# Altium PCB PCB1.PcbDoc (part 2 of 2)
Units mm, origin at the board's own origin, x right, y up, seen from the top; angles counter-clockwise.
Board outline 68.58 x 53.34 mm, 4 copper layers (Top Layer 1, GND Layer, GND Layer 2, Bottom Layer 2), stack 0.602 mm thick; 89 components, 77 nets, 453 pads, 4 vias.
Unrouted connection lines stored in the file: 288.
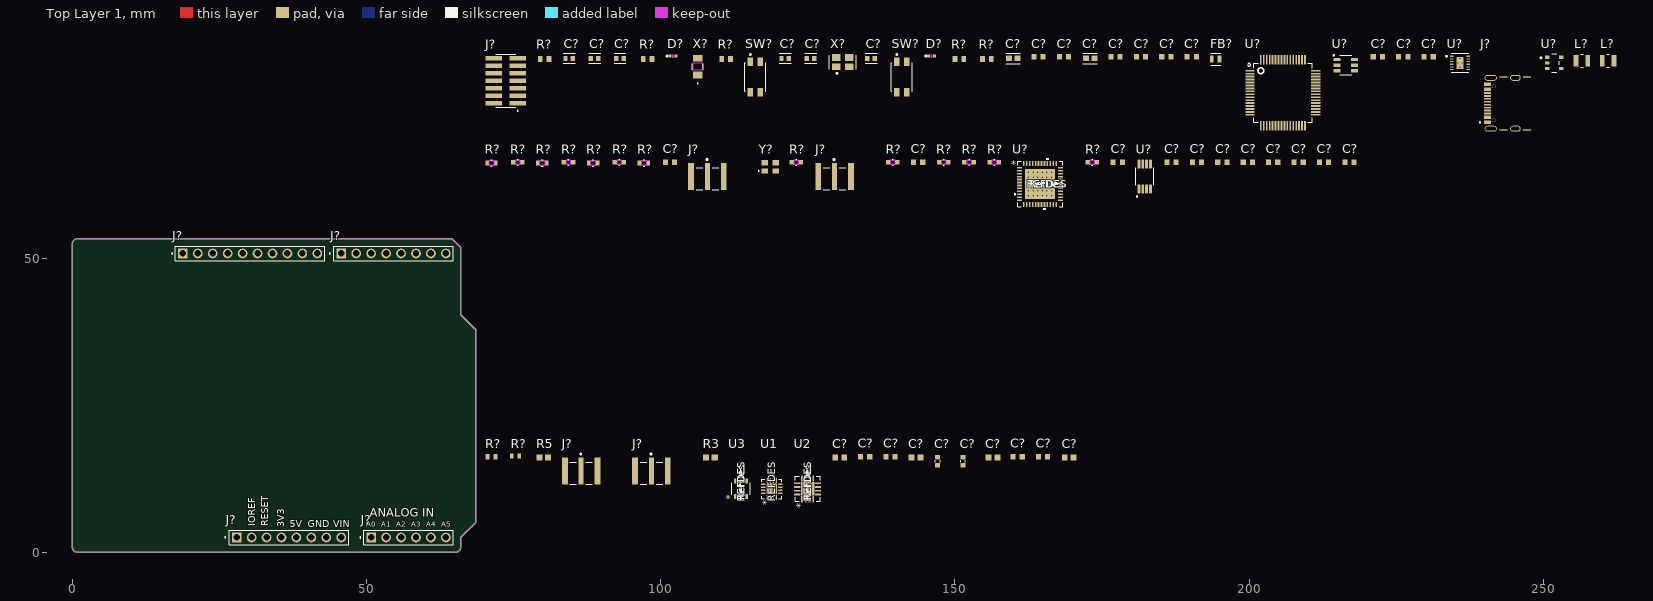
[diagram p0: Top Layer 1 view]

## Part data (continued)
R?: "RES 100K OHM 1% 1/10W 0603", Case/Package=0603, Manufacturer=Yageo, Max Operating Temperature=155°C, Min Operating Temperature=-55°C, Package Height=0.45mm, Package Length=1.6mm, Package Shape=Rectangular, Package Width=0.8mm, Power=100mW, Rated Temperature=70°C, Resistor Type="FIXED RESISTOR", Supplier Part Number=3697448, Temperature Coefficient (ppm/Cel)=100, Tolerance=1%, Working Voltage=75V, Additional Feature="LASER TRIMMABLE", Category="Chip SMD Resistors", ComponentLink1Description=https://datasheet.ciiva.com:443/pdfs/VipMasterIC/IC/YAGO/YAGO-S-A0008145938/YAGO-S-A0008145938-1.pdf?src-supplier=IHS+Markit, ComponentLink1URL=https://datasheet.ciiva.com:443/pdfs/VipMasterIC/IC/YAGO/YAGO-S-A0008145938/YAGO-S-A0008145938-1.pdf?src-supplier=IHS+Markit, ComponentLink2Description=https://datasheet.ciiva.com/11808/0900766b80f96399-11808107.pdf?src-supplier=Rs, ComponentLink2URL=https://datasheet.ciiva.com/11808/0900766b80f96399-11808107.pdf?src-supplier=Rs, ComponentLink3Description=https://datasheet.ciiva.com/22747/443971-22747516.pdf?src-supplier=Element14, ComponentLink3URL=https://datasheet.ciiva.com/22747/443971-22747516.pdf?src-supplier=Element14, ComponentLink4Description=https://datasheet.ciiva.com/46440/1868787-46440889.pdf?src-supplier=Element14, ComponentLink4URL=https://datasheet.ciiva.com/46440/1868787-46440889.pdf?src-supplier=Element14, ComponentLink5Description=https://datasheet.ciiva.com/7746/1738695-7746234.pdf?src-supplier=Element14, ComponentLink5URL=https://datasheet.ciiva.com/7746/1738695-7746234.pdf?src-supplier=Element14, ComponentLink6Description=https://datasheet.ciiva.com/7746/1738695-7746235.pdf?src-supplier=Element14, ComponentLink6URL=https://datasheet.ciiva.com/7746/1738695-7746235.pdf?src-supplier=Element14, ComponentLink7Description=https://datasheet.ciiva.com/7983/443971-7983593.pdf?src-supplier=Element14, ComponentLink7URL=https://datasheet.ciiva.com/7983/443971-7983593.pdf?src-supplier=Element14, Construction=Chip, JESD-609 Code=e3, Manufacturer Part Number=RC0603FR-07100KL, Mounting Technology="Surface Mount", Packaging="Tape and Reel", Pins=2, Pricing="5000=0.0011, 20000=0.0011, 75000=0.001, 150000=0.001, 375000=0.001 (USD)", Reach SVHC Compliant=Yes, RoHS=Yes, RoHS Compliant=Yes, Stock=23540000, Supplier="Future Electronics", Technology="METAL GLAZE/THICK FILM", Terminal Finish=Nickel, Termination=Wraparound
R? R?: "10 kOhms ±1% 0.1W, 1/10W Chip Resistor 0603 (1608 Metric) Moisture Resistant Thick Film", Case/Package=0603, Manufacturer=Yageo, Max Operating Temperature=155°C, Min Operating Temperature=-55°C, Package Height=0.45mm, Package Length=1.6mm, Package Shape=Rectangular, Package Width=0.8mm, Power=100mW, Rated Temperature=70°C, Resistor Type="FIXED RESISTOR", Supplier Part Number=4023214, Temperature Coefficient (ppm/Cel)=100, Tolerance=1%, Working Voltage=75V, Additional Feature="LASER TRIMMABLE", Category="Chip SMD Resistors", ComponentLink1Description=https://datasheet.ciiva.com:443/pdfs/VipMasterIC/IC/YAGO/YAGO-S-A0008145938/YAGO-S-A0008145938-1.pdf?src-supplier=IHS+Markit, ComponentLink1URL=https://datasheet.ciiva.com:443/pdfs/VipMasterIC/IC/YAGO/YAGO-S-A0008145938/YAGO-S-A0008145938-1.pdf?src-supplier=IHS+Markit, ComponentLink2Description=https://datasheet.ciiva.com/22747/443971-22747519.pdf?src-supplier=Element14, ComponentLink2URL=https://datasheet.ciiva.com/22747/443971-22747519.pdf?src-supplier=Element14, ComponentLink3Description=https://datasheet.ciiva.com/46440/1868787-46440891.pdf?src-supplier=Element14, ComponentLink3URL=https://datasheet.ciiva.com/46440/1868787-46440891.pdf?src-supplier=Element14, ComponentLink4Description=https://datasheet.ciiva.com/7660/38590-7660789.pdf?src-supplier=Element14, ComponentLink4URL=https://datasheet.ciiva.com/7660/38590-7660789.pdf?src-supplier=Element14, ComponentLink5Description=https://datasheet.ciiva.com/7746/1738695-7746239.pdf?src-supplier=Element14, ComponentLink5URL=https://datasheet.ciiva.com/7746/1738695-7746239.pdf?src-supplier=Element14, ComponentLink6Description=https://datasheet.ciiva.com/7983/443971-7983596.pdf?src-supplier=Element14, ComponentLink6URL=https://datasheet.ciiva.com/7983/443971-7983596.pdf?src-supplier=Element14, ComponentLink7Description=https://datasheet.ciiva.com/15189/getdatasheetpartid-409289-15189591.pdf?src-supplier=Verical, ComponentLink7URL=https://datasheet.ciiva.com/15189/getdatasheetpartid-409289-15189591.pdf?src-supplier=Verical, Construction=Chip, JESD-609 Code=e3, Manufacturer Part Number=RC0603FR-0710KL, Mounting Technology="Surface Mount", Packaging="Tape and Reel", Pins=2, Pricing="5000=0.0011, 25000=0.0011, 125000=0.001, 250000=0.001, 750000=0.001 (USD)", Reach SVHC Compliant=Yes, RoHS=Yes, RoHS Compliant=Yes, Stock=100610000, Supplier="Future Electronics", Technology="METAL GLAZE/THICK FILM", Terminal Finish=Nickel, Termination=Wraparound
R?: "RES SMD 2K OHM 1% 1/3W 0603", Case/Package=0603, Manufacturer=Vishay, Manufacturer Part Number=CRCW06032K00FKEA, Max Operating Temperature=155°C, Min Operating Temperature=-55°C, Package Height=0.45mm, Package Length=1.55mm, Package Shape=Rectangular, Package Width=0.85mm, Power=100mW, Rated Temperature=70°C, Resistor Type="FIXED RESISTOR", Temperature Coefficient (ppm/Cel)=100, Tolerance=1%, Working Voltage=75V, Category="Chip SMD Resistors", ComponentLink1Description=https://datasheet.ciiva.com:443/pdfs/VipMasterIC/IC/VISH/VISH-S-A0007266705/VISH-S-A0007266705-1.pdf?src-supplier=IHS+Markit, ComponentLink1URL=https://datasheet.ciiva.com:443/pdfs/VipMasterIC/IC/VISH/VISH-S-A0007266705/VISH-S-A0007266705-1.pdf?src-supplier=IHS+Markit, ComponentLink2Description=https://datasheet.ciiva.com/2465/dcrcwe3-2465564.pdf?src-supplier=Digikey, ComponentLink2URL=https://datasheet.ciiva.com/2465/dcrcwe3-2465564.pdf?src-supplier=Digikey, ComponentLink3Description=https://datasheet.ciiva.com/2465/dcrcwe3-2465565.pdf?src-supplier=Digikey, ComponentLink3URL=https://datasheet.ciiva.com/2465/dcrcwe3-2465565.pdf?src-supplier=Digikey, ComponentLink4Description=https://datasheet.ciiva.com/2465/dcrcwe3-2465566.pdf?src-supplier=Digikey, ComponentLink4URL=https://datasheet.ciiva.com/2465/dcrcwe3-2465566.pdf?src-supplier=Digikey, ComponentLink5Description=https://datasheet.ciiva.com/16755/70201119-16755770.pdf?src-supplier=Allied+Electronics, ComponentLink5URL=https://datasheet.ciiva.com/16755/70201119-16755770.pdf?src-supplier=Allied+Electronics, ComponentLink6Description=https://datasheet.ciiva.com/16765/70201119-16765388.pdf?src-supplier=Allied+Electronics, ComponentLink6URL=https://datasheet.ciiva.com/16765/70201119-16765388.pdf?src-supplier=Allied+Electronics, ComponentLink7Description=https://datasheet.ciiva.com/7673/1720486-7673525.pdf?src-supplier=Element14, ComponentLink7URL=https://datasheet.ciiva.com/7673/1720486-7673525.pdf?src-supplier=Element14, ComponentLink8Description=https://datasheet.ciiva.com/28621/125364-28621397.pdf?src-supplier=Element14, ComponentLink8URL=https://datasheet.ciiva.com/28621/125364-28621397.pdf?src-supplier=Element14, ComponentLink9Description=https://datasheet.ciiva.com/3257/dcrcwe3-3257366.pdf?src-supplier=Avnet, ComponentLink9URL=https://datasheet.ciiva.com/3257/dcrcwe3-3257366.pdf?src-supplier=Avnet, ComponentLink10Description=https://datasheet.ciiva.com/3257/dcrcwe3-3257367.pdf?src-supplier=Avnet, ComponentLink10URL=https://datasheet.ciiva.com/3257/dcrcwe3-3257367.pdf?src-supplier=Avnet, ComponentLink11Description=https://datasheet.ciiva.com/26314/fld-crcw-e3-data-en-26314682.pdf?src-supplier=Distrelec, ComponentLink11URL=https://datasheet.ciiva.com/26314/fld-crcw-e3-data-en-26314682.pdf?src-supplier=Distrelec, ComponentLink12Description=https://datasheet.ciiva.com/5551/dcrcwe3-109170-5551994.pdf?src-supplier=Mouser, ComponentLink12URL=https://datasheet.ciiva.com/5551/dcrcwe3-109170-5551994.pdf?src-supplier=Mouser, Construction=Chip, JESD-609 Code=e3, Mounting Technology="Surface Mount", Packaging="Tape and Reel", Pins=2, Pricing="5000=0.00112 (USD)", Reach SVHC Compliant=Yes, Reference Standard=AEC-Q200, RoHS=Yes, RoHS Compliant=Yes, Stock=2445000, Supplier=Avnet, Supplier Part Number=CRCW06032K00FKEA, Technology="METAL GLAZE/THICK FILM", Terminal Finish=Nickel, Termination=Wraparound
SW? SW?: library part EVQ-P2402W, "SWITCH TACTILE SPST-NO 0.02A 15V", Actuator Color=Natural, Contact Current Rating=20mA, Contact DC Max Rating R Load=.02A@15VDC, Contact Resistance=100mR, Contact Voltage(DC)-Max=15V, Manufacturer=Panasonic, Manufacturer Series=EVQP2, Max Operating Temperature=85°C, Min Operating Temperature=-40°C, Operating Force=2.4N, Package Quantity=1, Supplier Part Number=667-EVQ-P2402W, Actuator Length=0.85mm, Body Breadth=3.5mm, Body Height=1.65mm, Body Length or Diameter=4.7mm, Category="Tactile Switches", Circuit Configuration=1X1, ComponentLink1Description=https://datasheet.ciiva.com:443/pdfs/VipMasterIC/IC/PANA/PANAS38695/PANAS38695-1.pdf?src-supplier=IHS+Markit, ComponentLink1URL=https://datasheet.ciiva.com:443/pdfs/VipMasterIC/IC/PANA/PANAS38695/PANAS38695-1.pdf?src-supplier=IHS+Markit, ComponentLink2Description=https://datasheet.ciiva.com/25603/0900766b810ad3e5-25603951.pdf?src-supplier=Rs, ComponentLink2URL=https://datasheet.ciiva.com/25603/0900766b810ad3e5-25603951.pdf?src-supplier=Rs, ComponentLink3Description=https://datasheet.ciiva.com/2901/atk0000ce6-2901462.pdf?src-supplier=Digikey, ComponentLink3URL=https://datasheet.ciiva.com/2901/atk0000ce6-2901462.pdf?src-supplier=Digikey, ComponentLink4Description=https://datasheet.ciiva.com/2901/atk0000ce6-2901463.pdf?src-supplier=Digikey, ComponentLink4URL=https://datasheet.ciiva.com/2901/atk0000ce6-2901463.pdf?src-supplier=Digikey, ComponentLink5Description=https://datasheet.ciiva.com/2901/atk0000ce6-2901464.pdf?src-supplier=Digikey, ComponentLink5URL=https://datasheet.ciiva.com/2901/atk0000ce6-2901464.pdf?src-supplier=Digikey, ComponentLink6Description=https://datasheet.ciiva.com/8166/atv0000ce7-8166415.pdf?src-supplier=Avnet, ComponentLink6URL=https://datasheet.ciiva.com/8166/atv0000ce7-8166415.pdf?src-supplier=Avnet, ComponentLink7Description=https://datasheet.ciiva.com/30238/atv0000ce7-30238297.pdf?src-supplier=Onlinecomponents.com, ComponentLink7URL=https://datasheet.ciiva.com/30238/atv0000ce7-30238297.pdf?src-supplier=Onlinecomponents.com, Contact Bounce Time-Max=10ms, Contact Current(DC)-Max=20mA, Contact Plating=Silver, Current Rating=20mA, Depth=5.5mm, Electrical Life=500000Cycles, Height=2.5mm, Illumination Type=Non-Illuminated, JESD-609 Code=e4, Lead Free="Lead Free", Length=4.7mm, Manufacturer Part Number=EVQ-P2402W, Max Current Rating=20mA, Max Voltage Rating (DC)=15V, Mechanical Life=500000Cycles, Mount="Surface Mount", Mounting Technology="Surface Mount", Number of Switches=1, Operating Force-Max=2.4N, Orientation=Straight, Packaging="Tape and Reel", Pricing="1=0.74, 10=0.603, 50=0.603, 100=0.488, 1000=0.415, 10000=0.319 (USD)", Radiation Hardening=No, REACH SVHC="No SVHC", Reach SVHC Compliant=Yes, RoHS=Yes, RoHS Compliant=Yes, Series=EVQP2, Size=3.5mm, Stock=21943, Supplier=Mouser, Switch Action=MOMENTARY, Switch Function=Off-Mom, Switch Travel=0.25mm, Switch Type=Keypad, Terminal Finish=Gold, Termination=J-Bend, Throw Configuration=SPST, Voltage Rating (DC)=15V, Width=3.5mm
U1: "No Description Available", Mfr_Name="Analog Devices Inc", RefDes=RefDes, Type=Type
U2: "General-Purpose, âˆ’55Â°C to +125Â°C, Wide Bandwidth, DC-Coupled VGA", Manufacturer_Name="Analog Devices Inc", Copyright="Copyright (C) 2025 Ultra Librarian. All rights reserved.", Datasheet=https://www.analog.com/media/en/technical-documentation/data-sheets/AD8336.pdf, Manufacturer_Part_Number=AD8336ACPZ-RL, RefDes=RefDes, Type=Type
U3: library part LT6233CS6-10TRMPBF, "60MHz, Rail-to-Rail Output, 1.9nV/âˆšHz, 1.2mA Op Amp Family", Manufacturer_Name="Analog Devices Inc", Copyright="Copyright (C) 2025 Ultra Librarian. All rights reserved.", Datasheet=https://www.analog.com/media/en/technical-documentation/data-sheets/623345fc.pdf, Manufacturer_Part_Number=LT6233CS6-10#TRMPBF, RefDes=RefDes, Type=Type
U?: "TVS DIODE 3VWM 17VC SOT23-6", Breakdown Voltage-Nom=6V, Clamping Voltage-Max=17V, Manufacturer=STMicroelectronics, Max Operating Temperature=125°C, Min Operating Temperature=-40°C, Package Body Material=Plastic, Package Shape=Rectangular, Package Style="SMALL OUTLINEMeter", Peak Reflow Temperature (Cel)=260°C, Supplier Part Number=06X3442, Category="TVS Diodes", ComponentLink1Description=https://datasheet.ciiva.com:443/pdfs/VipMasterIC/IC/SGST/SGSTS36157/SGSTS36157-1.pdf?src-supplier=IHS+Markit, ComponentLink1URL=https://datasheet.ciiva.com:443/pdfs/VipMasterIC/IC/SGST/SGSTS36157/SGSTS36157-1.pdf?src-supplier=IHS+Markit, ComponentLink2Description=https://datasheet.ciiva.com/29883/dm00068844-29883857.pdf?src-supplier=Avnet, ComponentLink2URL=https://datasheet.ciiva.com/29883/dm00068844-29883857.pdf?src-supplier=Avnet, ComponentLink3Description=https://datasheet.ciiva.com/41443/001184005-da-01-en-tvs-diodes-esdalcl6-2sc6-sot-23-6-stm-41443461.pdf?src-supplier=Conrad, ComponentLink3URL=https://datasheet.ciiva.com/41443/001184005-da-01-en-tvs-diodes-esdalcl6-2sc6-sot-23-6-stm-41443461.pdf?src-supplier=Conrad, ComponentLink4Description=https://datasheet.ciiva.com/6575/dm00068844-6575530.pdf?src-supplier=Digikey, ComponentLink4URL=https://datasheet.ciiva.com/6575/dm00068844-6575530.pdf?src-supplier=Digikey, ComponentLink5Description=https://datasheet.ciiva.com/6575/dm00068844-6575531.pdf?src-supplier=Digikey, ComponentLink5URL=https://datasheet.ciiva.com/6575/dm00068844-6575531.pdf?src-supplier=Digikey, ComponentLink6Description=https://datasheet.ciiva.com/6575/dm00068844-6575532.pdf?src-supplier=Digikey, ComponentLink6URL=https://datasheet.ciiva.com/6575/dm00068844-6575532.pdf?src-supplier=Digikey, Diode Element Material=SILICON, Diode Type="TRANS VOLTAGE SUPPRESSOR", JESD-30 Code=R-PDSO-G6, JESD-609 Code=e3, Manufacturer Part Number=ESDALCL6-2SC6, Min Breakdown Voltage=6V, Moisture Sensitivity Level=1, Number of Elements=1, Pins=6, Polarity=Unidirectional, Reach SVHC Compliant=Yes, RoHS=Yes, RoHS Compliant=Yes, Supplier=Newark, Surface Mount=Yes, Technology=AVALANCHE, Terminal Finish=Tin, Terminal Form="Gull Wing", Terminal Position=DUAL
U?: "16-Bit, 40-MSPS Analog-to-Digital Converter (ADC) 48-VQFN -40 to 85", Manufacturer_Name="Texas Instruments", Copyright="Copyright (C) 2025 Ultra Librarian. All rights reserved.", Datasheet=https://www.ti.com/lit/gpn/ads5560, Manufacturer_Part_Number=ADS5560IRGZT, RefDes=RefDes, Type=Type
U?: "IC INST AMP 1 CIRCUIT 8MSOP", Manufacturer=Microchip, Peak Reflow Temperature (Cel)=260°C, Supplier Part Number=44AC2577, Time @ Peak Reflow Temperature-Max (s)=40s, Amplifier Type="INSTRUMENTATION AMPLIFIER", Category="Amplifiers - Op Amps, Buffer, Instrumentation", ComponentLink1Description=https://datasheet.ciiva.com:443/pdfs/VipMasterIC/IC/MCHP/MCHPS05684/MCHPS05684-1.pdf?src-supplier=IHS+Markit, ComponentLink1URL=https://datasheet.ciiva.com:443/pdfs/VipMasterIC/IC/MCHP/MCHPS05684/MCHPS05684-1.pdf?src-supplier=IHS+Markit, ComponentLink2Description=http://www.mouser.com/ds/2/268/20005318A-355773.pdf?src-supplier=Mouser, ComponentLink2URL=http://www.mouser.com/ds/2/268/20005318A-355773.pdf?src-supplier=Mouser, ComponentLink3Description=http://ww1.microchip.com/downloads/en/DeviceDoc/20005318A.pdf?src-supplier=Avnet, ComponentLink3URL=http://ww1.microchip.com/downloads/en/DeviceDoc/20005318A.pdf?src-supplier=Avnet, ComponentLink4Description=http://www.microchip.com/mymicrochip/filehandler.aspx?ddocname=en571166&src-supplier=Digikey, ComponentLink4URL=http://www.microchip.com/mymicrochip/filehandler.aspx?ddocname=en571166&src-supplier=Digikey, ComponentLink5Description=https://datasheet.octopart.com/MCP6N16T-010E-MS-Microchip-datasheet-27889795.pdf?src-supplier=microchipDIRECT, ComponentLink5URL=https://datasheet.octopart.com/MCP6N16T-010E-MS-Microchip-datasheet-27889795.pdf?src-supplier=microchipDIRECT, ComponentLink6Description=https://datasheet.octopart.com/MCP6N16T-010E-MS-Microchip-datasheet-27889795.pdf?src-supplier=Electro+Sonic, ComponentLink6URL=https://datasheet.octopart.com/MCP6N16T-010E-MS-Microchip-datasheet-27889795.pdf?src-supplier=Electro+Sonic, ComponentLink7Description=https://datasheet.octopart.com/MCP6N16T-010E-MS-Microchip-datasheet-27889795.pdf?src-supplier=Master+Electronics, ComponentLink7URL=https://datasheet.octopart.com/MCP6N16T-010E-MS-Microchip-datasheet-27889795.pdf?src-supplier=Master+Electronics, JESD-609 Code=e3, Manufacturer Part Number=MCP6N16T-010E/MS, Moisture Sensitivity Level=1, Pricing="1=2.64, 10=2.54, 25=2.16 (USD)", Reach SVHC Compliant=Yes, RoHS=Yes, RoHS Compliant=Yes, Stock=1362, Supplier=Newark, Terminal Finish=Tin
U?: "IC REG LINEAR 3.3V 600MA SOT25", Case/Package=SOT-23-5, Dropout Voltage=250mV, Max Input Voltage=6V, Max Operating Temperature=85°C, Max Output Current=600mA, Min Input Voltage=2.5V, Min Operating Temperature=-40°C, Output Voltage=3.3V, Package Quantity=1, Quiescent Current=55uA, Accuracy=1.5%, Height=1.3mm, Lead Free="Lead Free", Length=3.1mm, Mount="Surface Mount", Number of Outputs=1, Number of Pins=5, Number of Regulators=1, Output Current=600mA, Output Type=Fixed, Packaging="Tape and Reel", Polarity=Positive, Width=1.7mm
U?: "ARMÂ® CortexÂ®-M4 STM32F4 Microcontroller IC 32-Bit Single-Core 84MHz 128KB (128K x 8) FLASH 64-LQFP (10x10)", Package="LQFP-64 STMicroelectronics", Check_prices=https://www.snapeda.com/parts/STM32F401RBT6/STMicroelectronics/view-part/?ref=eda, MF=STMicroelectronics, MP=STM32F401RBT6, SnapEDA_Link=https://www.snapeda.com/parts/STM32F401RBT6/STMicroelectronics/view-part/?ref=snap
U?: "IC REG AMOLED DISPL 2OUT 12WSON", Case/Package=QFN, Max Operating Temperature=85°C, Max Supply Voltage=5V, Min Operating Temperature=-40°C, Min Supply Voltage=2.9V, Output Voltage=-5V, Package Quantity=3000, Lead Free="Lead Free", Mount="Surface Mount", Number of Channels=2, Number of Outputs=2, Number of Pins=12, Packaging="Tape and Reel", Radiation Hardening=No, RoHS Compliant=Yes
X?: "CRYSTAL 32.7680KHZ 7PF SMD", Frequency Tolerance=20ppm, Load Capacitance=7pF, Manufacturer=Seiko, Max Operating Temperature=85°C, Mfr_Name=Epson, Min Operating Temperature=-40°C, Operating Frequency-Nom=0.032768, Supplier Part Number=728-1074-1-ND, Aging="3 PPM/FIRST YEAR", Category=Crystals, ComponentLink1Description=https://datasheet.ciiva.com:443/pdfs/VipMasterIC/IC/SIIS/SIISS03527/SIISS03527-1.pdf?src-supplier=IHS+Markit, ComponentLink1URL=https://datasheet.ciiva.com:443/pdfs/VipMasterIC/IC/SIIS/SIISS03527/SIISS03527-1.pdf?src-supplier=IHS+Markit, ComponentLink2Description=http://www.mouser.com/ds/2/360/file_PRODUCT_MASTER_50812_GRAPHIC03-542305.pdf?src-supplier=Mouser, ComponentLink2URL=http://www.mouser.com/ds/2/360/file_PRODUCT_MASTER_50812_GRAPHIC03-542305.pdf?src-supplier=Mouser, ComponentLink3Description=http://www.sii.co.jp/en/quartz/files/2013/03/file_PRODUCT_MASTER_50812_GRAPHIC03.pdf?src-supplier=Digikey, ComponentLink3URL=http://www.sii.co.jp/en/quartz/files/2013/03/file_PRODUCT_MASTER_50812_GRAPHIC03.pdf?src-supplier=Digikey, ComponentLink4Description=https://www.sii.co.jp/en/quartz/files/2013/03/SC-32S_Leaflet_e20151217.pdf?src-supplier=Digikey, ComponentLink4URL=https://www.sii.co.jp/en/quartz/files/2013/03/SC-32S_Leaflet_e20151217.pdf?src-supplier=Digikey, Crystal/Resonator Type="PARALLEL - FUNDAMENTAL", Drive Level=0.1uW, ESR=70kR, Manufacturer Part Number=SC32S-7PF20PPM, Mounting Technology="Surface Mount", Pricing="1=0.38, 10=0.328, 50=0.2954, 100=0.2825, 500=0.25468, 1000=0.24362 (USD)", Reach SVHC Compliant=Yes, RoHS=Yes, RoHS Compliant=Yes, Stock=104064, Supplier=Digikey
X?: "CRYSTAL 16.0000MHZ 9PF SMD", Frequency Stability=0.0018%, Frequency Tolerance=10ppm, Load Capacitance=9pF, Manufacturer=Epson, Max Operating Temperature=85°C, Min Operating Temperature=-40°C, Operating Frequency-Nom=160, Supplier Part Number=SER4070CT-ND, Additional Feature="TAPE AND REEL", Aging="1 PPM/FIRST YEAR", Category=Crystals, ComponentLink1Description=https://datasheet.ciiva.com:443/pdfs/VipMasterIC/IC/SEIK/SEIKS02827/SEIKS02827-1.pdf?src-supplier=IHS+Markit, ComponentLink1URL=https://datasheet.ciiva.com:443/pdfs/VipMasterIC/IC/SEIK/SEIKS02827/SEIKS02827-1.pdf?src-supplier=IHS+Markit, ComponentLink2Description=https://www.eea.epson.com/wp-content/uploads/2016/11/November-2016-PCS-MASTER-BOOK.pdf?src-supplier=Verical, ComponentLink2URL=https://www.eea.epson.com/wp-content/uploads/2016/11/November-2016-PCS-MASTER-BOOK.pdf?src-supplier=Verical, ComponentLink3Description=https://www5.epsondevice.com/en/information/support/pdf/june_2018_psc_masterbook.pdf?src-supplier=Digikey, ComponentLink3URL=https://www5.epsondevice.com/en/information/support/pdf/june_2018_psc_masterbook.pdf?src-supplier=Digikey, ComponentLink4Description=https://datasheet.octopart.com/TSX-3225-16.0000MF18X-AC0-Epson-datasheet-61114919.pdf?src-supplier=Future+Electronics, ComponentLink4URL=https://datasheet.octopart.com/TSX-3225-16.0000MF18X-AC0-Epson-datasheet-61114919.pdf?src-supplier=Future+Electronics, ComponentLink5Description=https://www.eea.epson.com/wp-content/uploads/2016/11/November-2016-PCS-MASTER-BOOK.pdf?src-supplier=Mouser, ComponentLink5URL=https://www.eea.epson.com/wp-content/uploads/2016/11/November-2016-PCS-MASTER-BOOK.pdf?src-supplier=Mouser, ComponentLink6Description=https://datasheet.octopart.com/TSX-3225-16.0000MF18X-AC0-Epson-datasheet-140567378.pdf?src-supplier=Arrow.cn, ComponentLink6URL=https://datasheet.octopart.com/TSX-3225-16.0000MF18X-AC0-Epson-datasheet-140567378.pdf?src-supplier=Arrow.cn, Crystal/Resonator Type="PARALLEL - FUNDAMENTAL", Drive Level=1uW, ESR=60R, JESD-609 Code=e4, Manufacturer Part Number="TSX-3225 16.0000MF18X-AC0", Mounting Technology="Surface Mount", Pricing="1=0.39, 10=0.342, 50=0.3104, 100=0.2976, 500=0.26974 (USD)", Reach SVHC Compliant=Yes, RoHS=Yes, RoHS Compliant=Yes, Stock=29085, Supplier=Digikey, Terminal Finish=Nickel
Y?: "subminiature SMD oscillators", Package=None, Availability=Unavailable, MP=ECS-2033-400-BN, Price=None

## Via types
v1: diameter 0.5, hole 0.2, Top Layer 1 to Bottom Layer 2, 4 vias

## Nets (pads, with @x,y where several pads share a name; then routed paths per layer and width w, separated by ;. In a path a pad name is that pad's centre, name@x,y a point inside that pad or via, vN(x,y) a via of type N, cw(c..) or ccw(c..) an arc to the next point about the centre after c; other vN are vias at no path point)
3.3V: J?.2@30.48,2.54 J?.4@35.56,2.54
3V3: C?.1@176.893,66.294 C?.1@186.037,66.294 C?.1@190.355,66.294 C?.1@194.673,66.294 C?.1@198.991,66.294 C?.1@203.309,66.294 C?.1@207.627,66.294 C?.1@211.945,66.294 C?.1@216.263,66.294 C?.2@231.285,84.201 R?.1@96.406,66.167 R?.2@93.739,66.294 U?.1@181.27,61.776 U?.2@160.99,64.861 U?.5@253.041,84.135 U?.8@160.99,61.861 U?.8@181.27,65.986 U?.18@164.215,59.136 U?.20@165.215,59.136 U?.22@166.215,59.136 U?.24@167.216,59.136 U?.26@167.94,60.361 U?.35@167.94,64.861 Y?.4
ADC_D0: J?.8@63.5,50.8 U?.31@167.94,62.861 U?.56
ADC_D1: J?.7@60.96,50.8 U?.32@167.94,63.361 U?.55
ADC_D2: J?.6@58.42,50.8 U?.33@167.94,63.861 U?.54
ADC_D3: J?.5@55.88,50.8 U?.34@167.94,64.361 U?.53
ADC_D4: J?.4@53.34,50.8 U?.37@167.216,66.086 U?.52
ADC_D5: J?.3@50.8,50.8 U?.38@166.716,66.086 U?.51
ADC_D6: J?.2@48.26,50.8 U?.39@166.215,66.086 U?.50
ADC_D7: J?.1@45.72,50.8 U?.40@165.715,66.086 U?.43@211.34,79.355
ADC_D8: J?.10@41.656,50.8 U?.41@165.215,66.086 U?.42@211.34,78.855
ADC_D9: J?.9@39.116,50.8 U?.41@211.34,78.355 U?.42@164.715,66.086
ADC_D10: J?.8@36.576,50.8 U?.40@211.34,77.855 U?.43@164.215,66.086
ADC_D11: J?.7@34.036,50.8 U?.39@211.34,77.355 U?.44@163.715,66.086
ADC_D12: J?.6@31.496,50.8 U?.38@211.34,76.855 U?.45@163.215,66.086
ADC_D13: J?.5@28.956,50.8 U?.37@211.34,76.355 U?.46@162.715,66.086
ADC_D14: J?.2@21.336,50.8 U?.36@211.34,75.855 U?.47@162.214,66.086
ADC_D15: J?.1@18.796,50.8 U?.35@211.34,75.355 U?.48@161.714,66.086
ADC_RST: U?.15@200.14,74.855 U?.30@167.94,62.361
ADCIN: R?.2@174.13,66.294 U?.7@181.92,65.986 U?.15@162.715,59.136
BTN_BOOT: D?.2@102.615,84.328 R?.1@110.375,83.82 SW?.3@115.228,78.197
BTN_R\S\T\: D?.2@146.557,84.328 R?.1@149.999,83.82 SW?.4@141.82,78.197
CLK_P: U?.10@160.99,60.861 Y?.3
CLKOUT_M: U?.4@160.99,63.861 U?.22@204.49,72.505
CLKOUT_P: U?.5@160.99,63.361 U?.21@203.99,72.505
DFS: R?.2@71.996,66.167 R?.2@80.632,66.167 R?.2@89.268,66.167 R?.2@97.904,66.167 U?.6@160.99,62.861
In: J?.1@86.487,13.843 U1.5
MCU_BOOT: C?.1@92.464,83.947 R?.2@111.875,83.82 U?.60
MCU_R\S\T\: C?.1@135.136,83.947 J?.12 R?.2@151.499,83.82 U?.7@200.14,78.855
MCU_SWCLK: J?.6@71.625,78.867 U?.49@209.49,83.705
MCU_SWDIO: J?.4@71.625,77.597 R?.1@79.514,83.82 U?.46@211.34,80.855
MEMS_V: J?.1@129.54,63.881 U?.2@181.92,61.776
MODE: C?.1@83.828,83.947 C?.1@133.967,16.256 C?.1@138.285,16.256 C?.1@147.066,16.205 C?.1@151.384,16.205 C?.1@159.167,83.947 C?.1@159.875,16.256 C?.1@163.431,84.201 C?.1@164.193,16.256 C?.1@172.248,83.947 C?.1@225.407,84.201 C?.1@229.725,84.201 C?.2@89.4,83.947 C?.2@93.718,83.947 C?.2@121.785,83.947 C?.2@126.103,83.947 C?.2@131.188,16.129 C?.2@136.39,83.947 C?.2@144.142,16.129 C?.2@144.544,66.294 C?.2@157.223,16.129 C?.2@169.309,84.201 C?.2@170.177,16.129 C?.2@178.072,84.201 C?.2@178.453,66.294 C?.2@182.39,84.201 C?.2@186.708,84.201 C?.2@187.597,66.294 C?.2@191.026,84.201 C?.2@191.915,66.294 C?.2@196.233,66.294 C?.2@200.551,66.294 C?.2@204.869,66.294 C?.2@209.187,66.294 C?.2@213.505,66.294 C?.2@217.823,66.294 C?.2@222.649,84.201 D?.1 J?.1@107.95,63.881 J?.4@26.416,50.8 J?.5@75.695,78.867 J?.6@40.64,2.54 J?.7@43.18,2.54 J?.7@75.695,80.137 J?.11 J?.A1_B12 J?.B1_A12 J?.SH1 J?.SH2 J?.SH3 J?.SH4 L?.2@261.985,83.566 R?.1@70.498,66.167 R?.1@74.917,66.294 R?.1@97.04,83.82 R?.1@122.288,66.294 R?.2@71.947,16.256 SW?.3@140.12,78.197 U1.2 U1.3 U1.4 U1.7 U1.8 U1.9 U1.10 U1.13 U1.16 U1.17 U2.2 U2.3 U2.6 U2.7 U2.12 U2.14 U2.15 U2.16 U2.17 U3.5 U?.1@160.99,65.361 U?.2@214.941,82.804 U?.2@234.439,83.86 U?.2@250.641,83.185 U?.4@183.22,61.776 U?.4@234.439,82.96 U?.5@234.439,82.51 U?.6@234.439,82.06 U?.8@237.239,82.51 U?.9@160.99,61.361 U?.12@160.99,59.861 U?.12@200.14,76.355 U?.13@235.839,83.185 U?.14@162.214,59.136 U?.17@163.715,59.136 U?.18@202.49,72.505 U?.19@164.715,59.136 U?.23@166.716,59.136 U?.25@167.94,59.861 U?.31@208.99,72.505 U?.36@167.94,65.361 U?.47@211.34,81.355 U?.49@164.465,62.611 U?.63 X?.2@132.037,82.512 X?.4 Y?.2
  other v1: 235.839,82.435 235.489,83.185 236.189,83.185 235.839,83.935
NetC1_2: U1.6
NetC2_1: U3.3
NetC?_1: C?.1@221.089,84.201 L?.1@255.54,83.566 U?.7@237.239,82.06 U?.11@237.239,83.86 U?.12@237.239,84.31
NetC?_2: C?.2@160.619,83.947 U?.30@208.49,72.505
NetF?_2: FB?.1
NetL?_1: L?.1@259.985,83.566 U?.10@237.239,83.41
NetL?_2: L?.2@257.54,83.566 U?.1@234.439,84.31
NetR3_2: R3.2 R5.1 U3.4
NetR?_1: R?.1@74.661,16.383 U2.5
NetR?_2: U2.11
OE: U?.7@160.99,62.361
OSC32_IN: C?.1@88.146,83.947 U?.3@200.14,80.855 X?.2@106.299,83.972
OSC32_OUT: C?.2@85.082,83.947 U?.4@200.14,80.355 X?.1@106.299,81.128
OSC_IN: C?.1@120.531,83.947 U?.5@200.14,79.855 X?.1@129.837,82.512
OSC_OUT: C?.1@124.849,83.947 U?.6@200.14,79.355 X?.3
Out: J?.1@98.425,13.843 R5.2 U3.1
OVR: U?.3@160.99,64.361 U?.14@200.14,75.355
REF_V: R?.2@123.838,66.294 R?.2@153.175,66.294 U?.3@182.57,61.776
SCLK: U?.16@200.14,74.355 U?.29@167.94,61.861
SDATA: U?.17@201.99,72.505 U?.28@167.94,61.361
SEN: U?.20@203.49,72.505 U?.27@167.94,60.861
"TIA Out": U1.15 U2.4
UART_MCU_TO_DEBUG_RX: J?.13 U?.59
UART_MCU_TO_DEBUG_TX: J?.14 U?.58
USB_5V: J?.A4_B9 J?.B4_A9 U?.5@217.875,82.804
USB_CC1: J?.A5@240.482,75.077
USB_CC2: J?.B5
USB_D_N: U?.6@217.875,83.754 U?.44@211.34,79.855
USB_D_P: U?.4@217.875,81.854 U?.45@211.34,80.355
USB_N: J?.A7 J?.B7 U?.1@214.941,83.754
USB_P: J?.A6@240.482,76.077 J?.B6 U?.3@214.941,81.854
V+: C?.1@129.67,16.129 C?.1@155.705,16.129 C?.2@135.527,16.256 C?.2@161.435,16.256 U2.13 U3.6 U?.3@234.439,83.41
V-: C?.1@142.624,16.129 C?.1@168.659,16.129 C?.2@139.845,16.256 C?.2@165.753,16.256 U2.10 U3.2 U?.9@237.239,82.96
VCCI: C?.2@102.38,66.294 C?.2@147.066,14.783 C?.2@151.384,14.783 U1.1 U1.11
VCM: R?.2@140.221,66.294 U?.11@160.99,60.361 U?.13@161.714,59.136 U?.16@163.215,59.136
VDD_3_8: R?.1@79.134,66.167 R?.1@83.553,66.294 R?.2@76.467,66.294
VDD_5_8: R?.1@87.77,66.167 R?.1@92.189,66.294 R?.2@85.103,66.294
VDD_MCU: C?.1@167.749,84.201 C?.1@176.512,84.201 C?.1@180.83,84.201 C?.1@185.148,84.201 C?.1@189.466,84.201 C?.2@164.991,84.201 C?.2@173.7,83.947 J?.3@75.695,77.597 R?.2@81.014,83.82 R?.2@156.198,83.82 SW?.4@116.928,78.197 U?.1@200.14,81.855 U?.13@200.14,75.855 U?.19@202.99,72.505 U?.32@209.49,72.505 U?.48@211.34,81.855 U?.64
VFG: R?.1@147.307,66.294 R?.1@172.58,66.294 U?.6@182.57,65.986
"VGA Out": R3.1 U2.1
VPWR_PWM: R?.1@151.625,66.294
VREF: C?.1@142.984,66.294 R?.1@138.671,66.294 R?.2@148.857,66.294 U?.5@183.22,65.986
VUSB: C?.2@226.967,84.201 R?.1@155.943,66.294 R?.2@157.493,66.294 U?.1@250.641,84.135 U?.3@250.641,82.235
VUSB_IN: C?.1@100.82,66.294 FB?.2
pads on no net: J?. J?.1@27.94,2.54 J?.1@75.695,76.327 J?.2@71.625,76.327 J?.3@23.876,50.8 J?.3@33.02,2.54 J?.5@38.1,2.54 J?.8@45.72,2.54 J?.8@71.625,80.137 J?.9@75.695,81.407 J?.10@71.625,81.407 J?.A1 J?.A2 J?.A3 J?.A4 J?.A5@60.96,2.54 J?.A6@63.5,2.54 J?.A8 J?.B8 R?.1@70.547,16.256 R?.1@154.698,83.82 R?.2@75.961,16.383 R?.2@98.54,83.82 SW?.1 SW?.2 U1.12 U1.14 U2.8 U2.9 U?.2@200.14,81.355 U?.4@253.041,82.235 U?.8@200.14,78.355 U?.9@200.14,77.855 U?.10@200.14,77.355 U?.11@200.14,76.855 U?.21@165.715,59.136 U?.23@204.99,72.505 U?.24@205.49,72.505 U?.25@205.99,72.505 U?.26@206.49,72.505 U?.27@206.99,72.505 U?.28@207.49,72.505 U?.29@207.99,72.505 U?.33@211.34,74.355 U?.34@211.34,74.855 U?.57 U?.61 U?.62 U?.V Y?.1

## Keep-outs
Keep-Out Layer:
  lines w0.254: 0,52.34 0,1 ccw(c1,1) 1,0 65.04,0 ccw(c65.04,1) 66.04,1 66.04,2.54 68.58,5.08 68.58,37.846 66.04,40.386 ; 1,53.34 64.516,53.34 66.04,51.816

## Silkscreen, mask and mechanical layers (free items; w line width, h text height)
Top Overlay:
  text "ANALOG IN" at 50.546,6.096 h1.42
  text "IOREF" at 31.115,4.445 h1.21 r90
  text "RESET" at 33.274,4.445 h1.21 r90
  text "3V3" at 36.068,4.318 h1.21 r90
  text "5V" at 36.957,4.318 h1.21
  text "VIN" at 44.323,4.318 h1.21
  text "A0" at 49.989,4.33 h0.86
  text "A1" at 52.529,4.33 h0.86
  text "A2" at 55.069,4.33 h0.86
  text "A3" at 57.609,4.33 h0.86
  text "A4" at 60.149,4.33 h0.86
  text "A5" at 62.689,4.33 h0.86
  text "GND" at 40.013,4.305 h1.21
Dimensions:
  lines w0.254: 0,52.34 0,1 ccw(c1,1) 1,0 65.04,0 ccw(c65.04,1) 66.04,1 66.04,2.54 68.58,5.08 68.58,37.846 66.04,40.386 ; 1,53.34 64.516,53.34 66.04,51.816
Mechanical 7:
  text "QUEBEC" at 43.053,56.261 h1.51
  text "MADE IN" at 30.988,56.134 h1.51

## Text inside footprints (layer, text, board x,y; h text height)
J?: Top Assembly "SMA" at 128.607,63.531 h0.7; Mechanical 13 "PCB EDGE" at 133.347,61.777 h0.41
J?: Top Assembly "SMA" at 107.017,63.531 h0.7; Mechanical 13 "PCB EDGE" at 111.757,61.777 h0.41
J?: Top Assembly "SMA" at 97.492,13.493 h0.7; Mechanical 13 "PCB EDGE" at 102.232,11.739 h0.41
J?: Top Assembly "SMA" at 85.554,13.493 h0.7; Mechanical 13 "PCB EDGE" at 90.294,11.739 h0.41
J?: Mechanical 13 "PCB EDGE" at 247.737,81.727 h0.41 r90
U1: Top Overlay "REFDES" at 119.507,8.572 h1.27 r90; Top Overlay "*" at 118.507,7.988 h1.27 r90; Mechanical 13 "RefDes2" at 119.507,8.572 h1.27 r90; Mechanical 13 "*" at 118.507,9.436 h1.27 r90
U2: Top Overlay "*" at 124.303,7.544 h1.27 r90; Top Overlay "RefDes" at 125.603,8.89 h1.27 r90; Top Overlay "REFDES" at 125.603,8.572 h1.27 r90; Mechanical 13 "*" at 124.303,9.246 h1.27 r90; Mechanical 13 "RefDes2" at 125.603,8.572 h1.27 r90
U3: Top Overlay "RefDes" at 114.3,8.89 h1.27 r90; Top Overlay "*" at 112.334,8.909 h1.27 r90; Top Overlay "REFDES" at 114.3,8.572 h1.27 r90; Mechanical 13 "RefDes2" at 114.3,8.572 h1.27 r90; Mechanical 13 "*" at 113.563,9.982 h1.27 r90
U?: Top Overlay "*" at 159.613,65.357 h1.27; Top Overlay "RefDes" at 162.56,61.976 h1.27; Top Overlay "REFDES" at 162.243,61.976 h1.27; Mechanical 13 "*" at 159.613,65.357 h1.27; Mechanical 13 "RefDes2" at 162.243,61.976 h1.27